# EAGLE board ZED_BREAKOUT v32 (EAGLE 9.7.0)
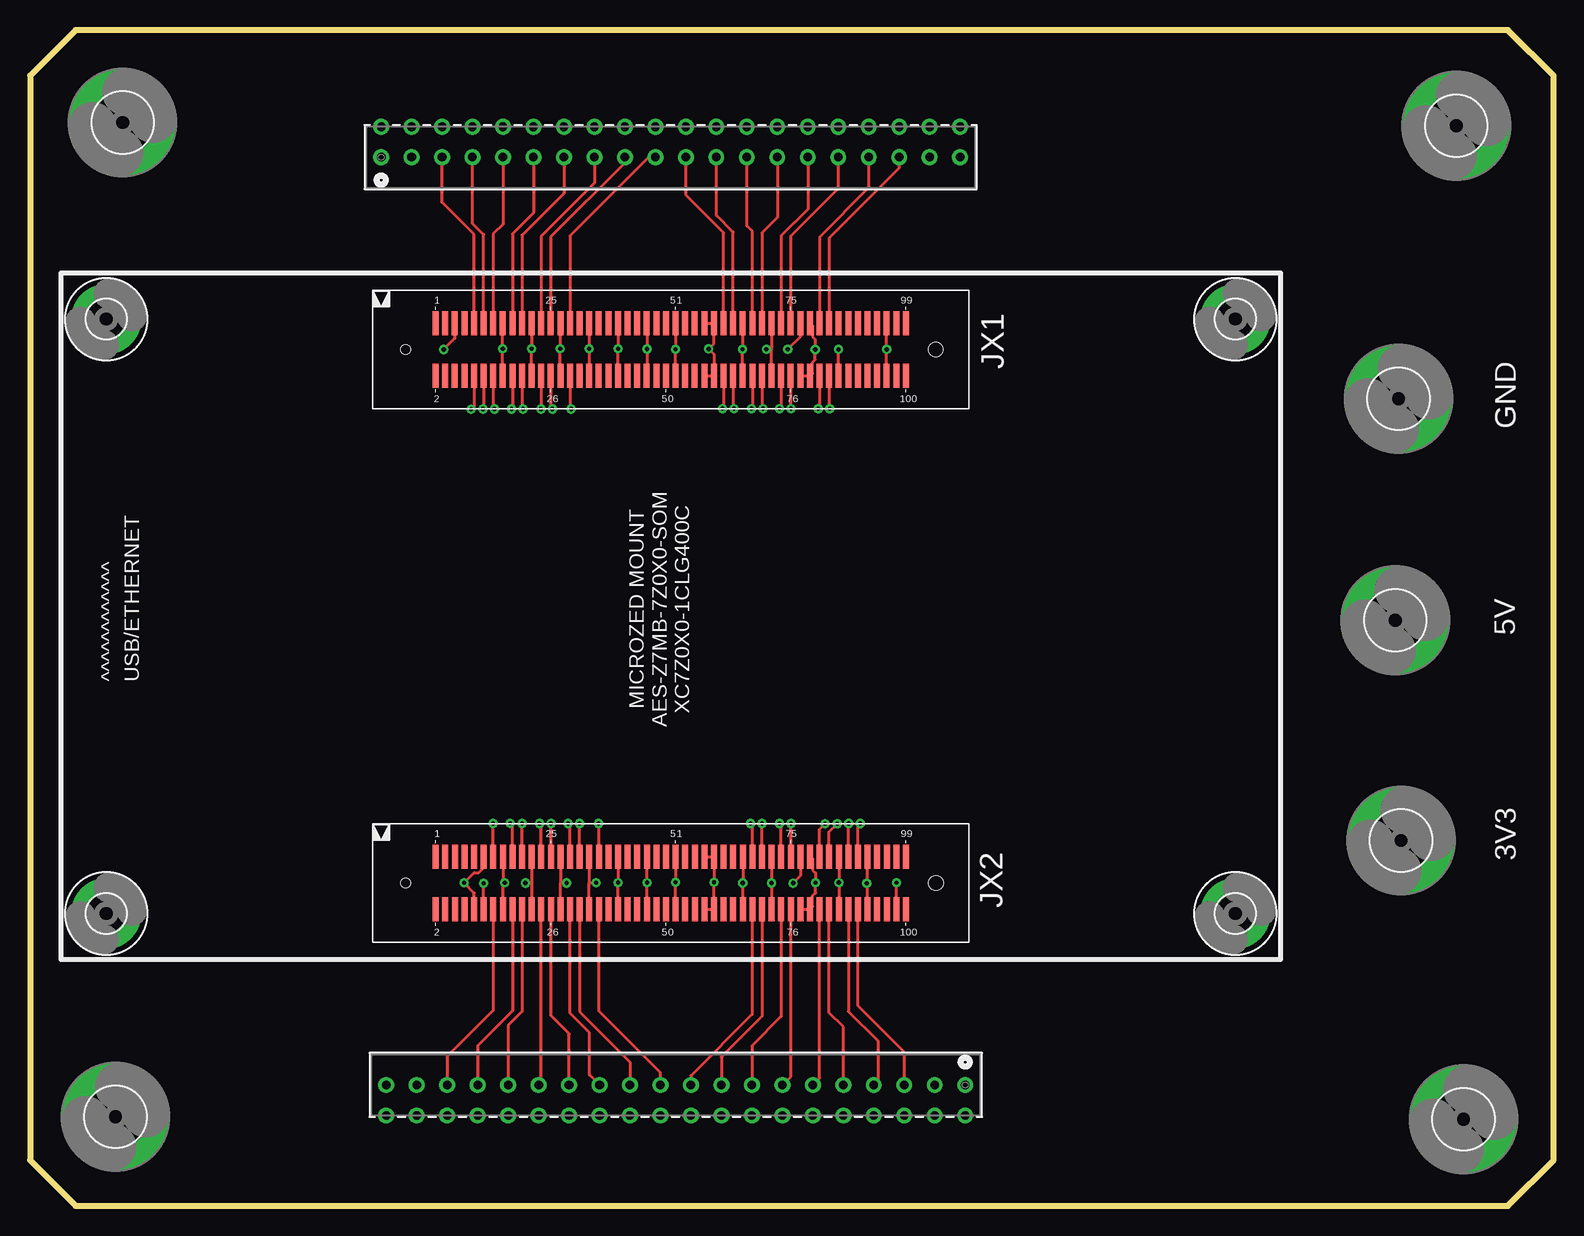
[diagram p0: board, top side]
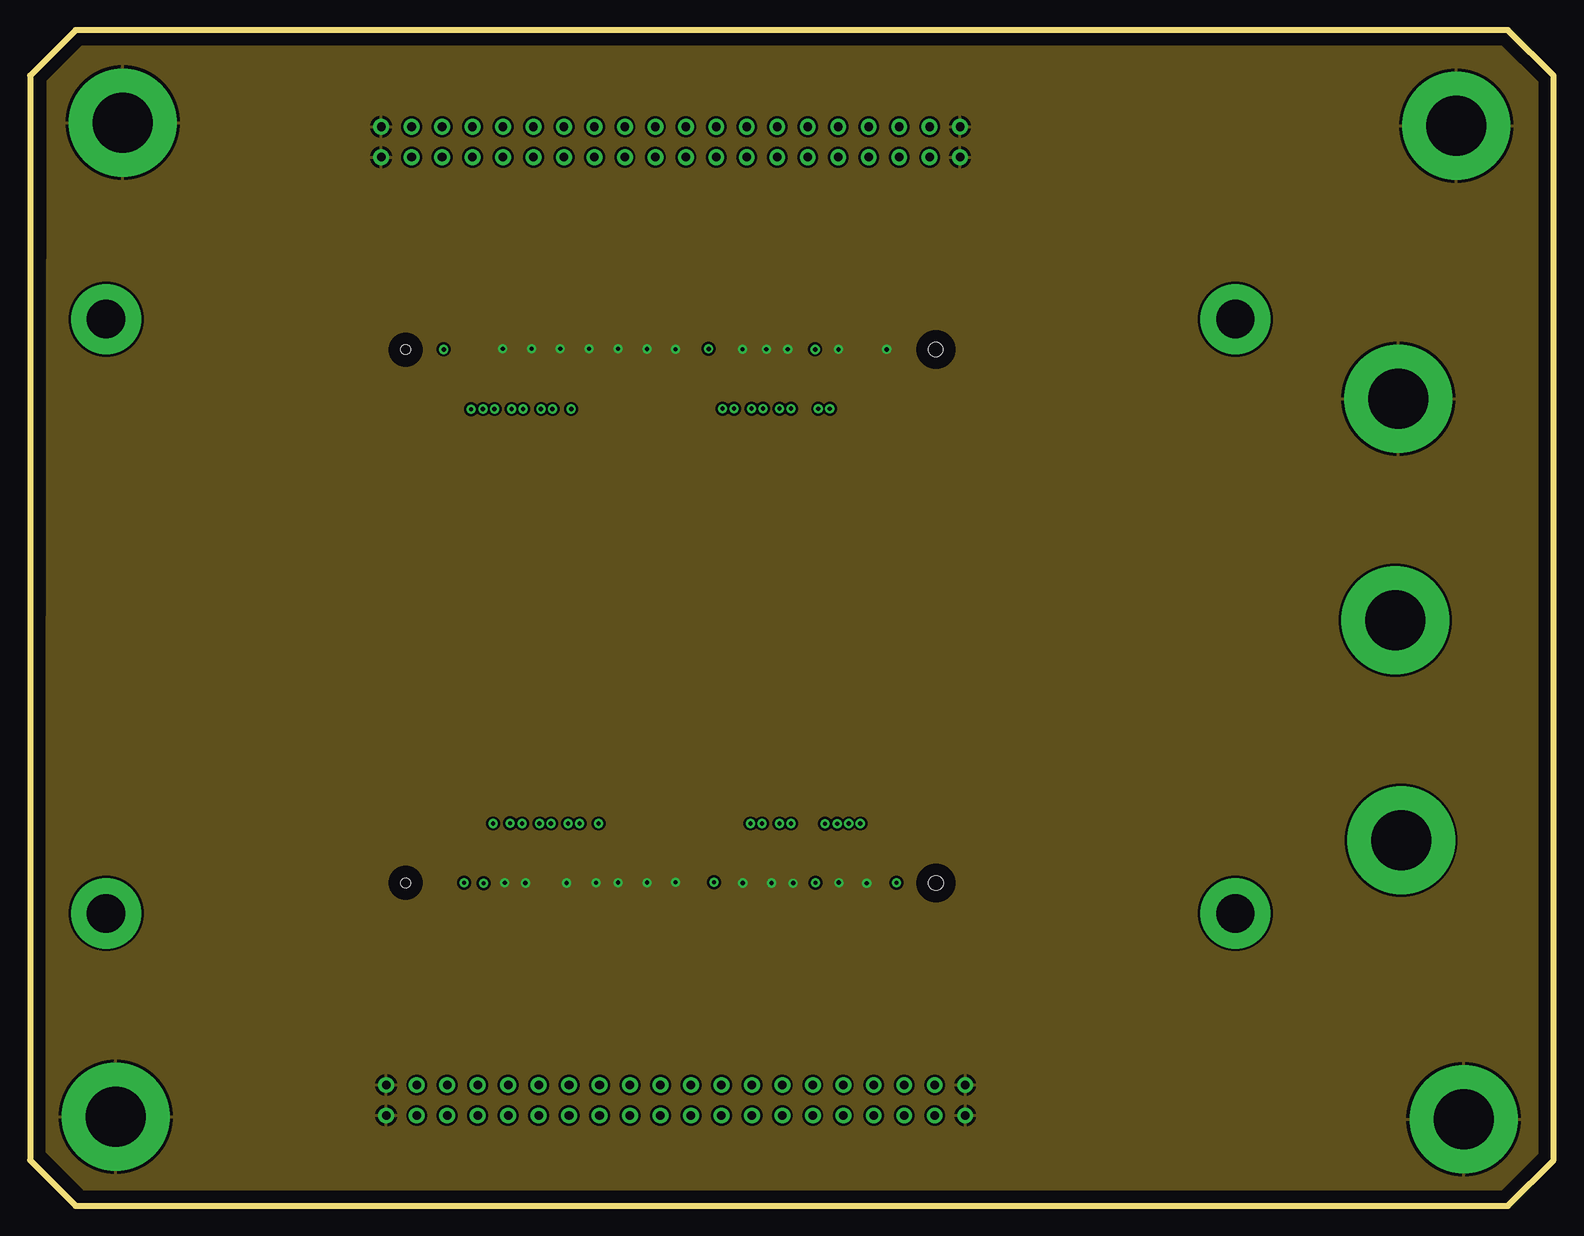
[diagram p1: board, inner layer Route2]
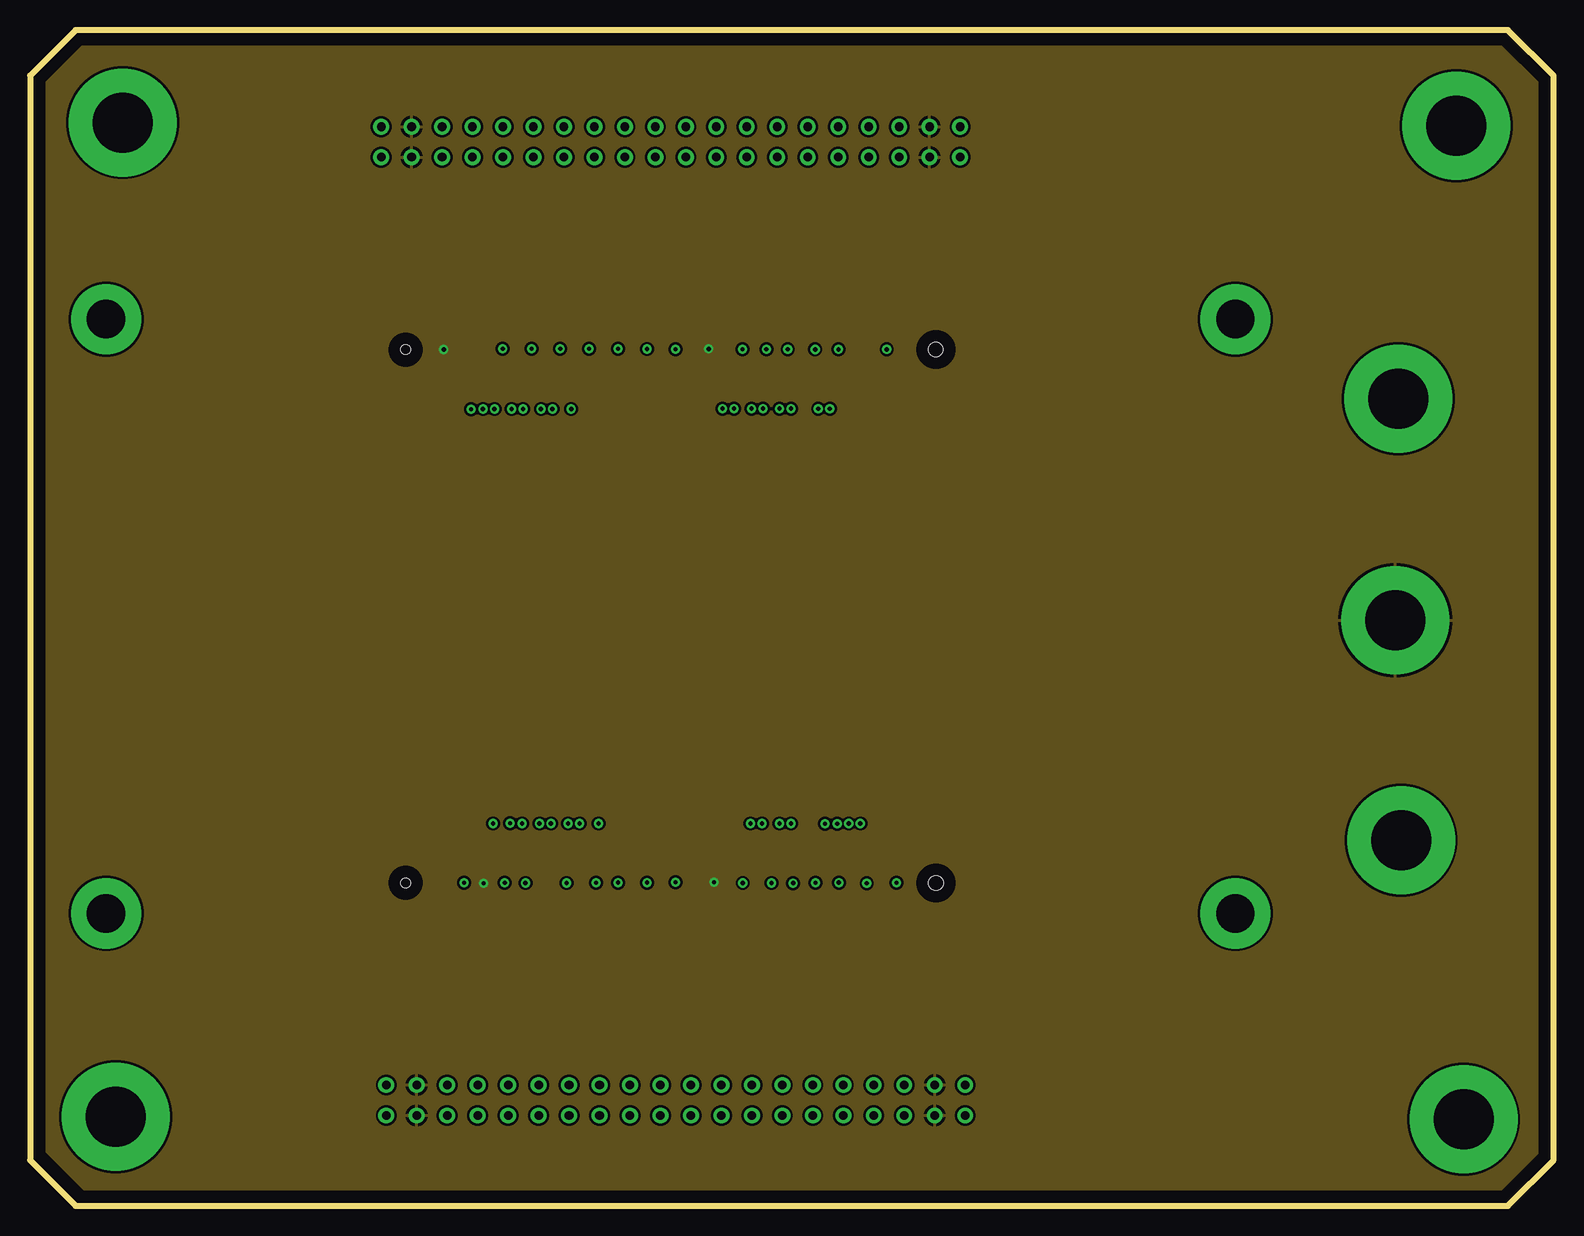
[diagram p2: board, inner layer Route3]
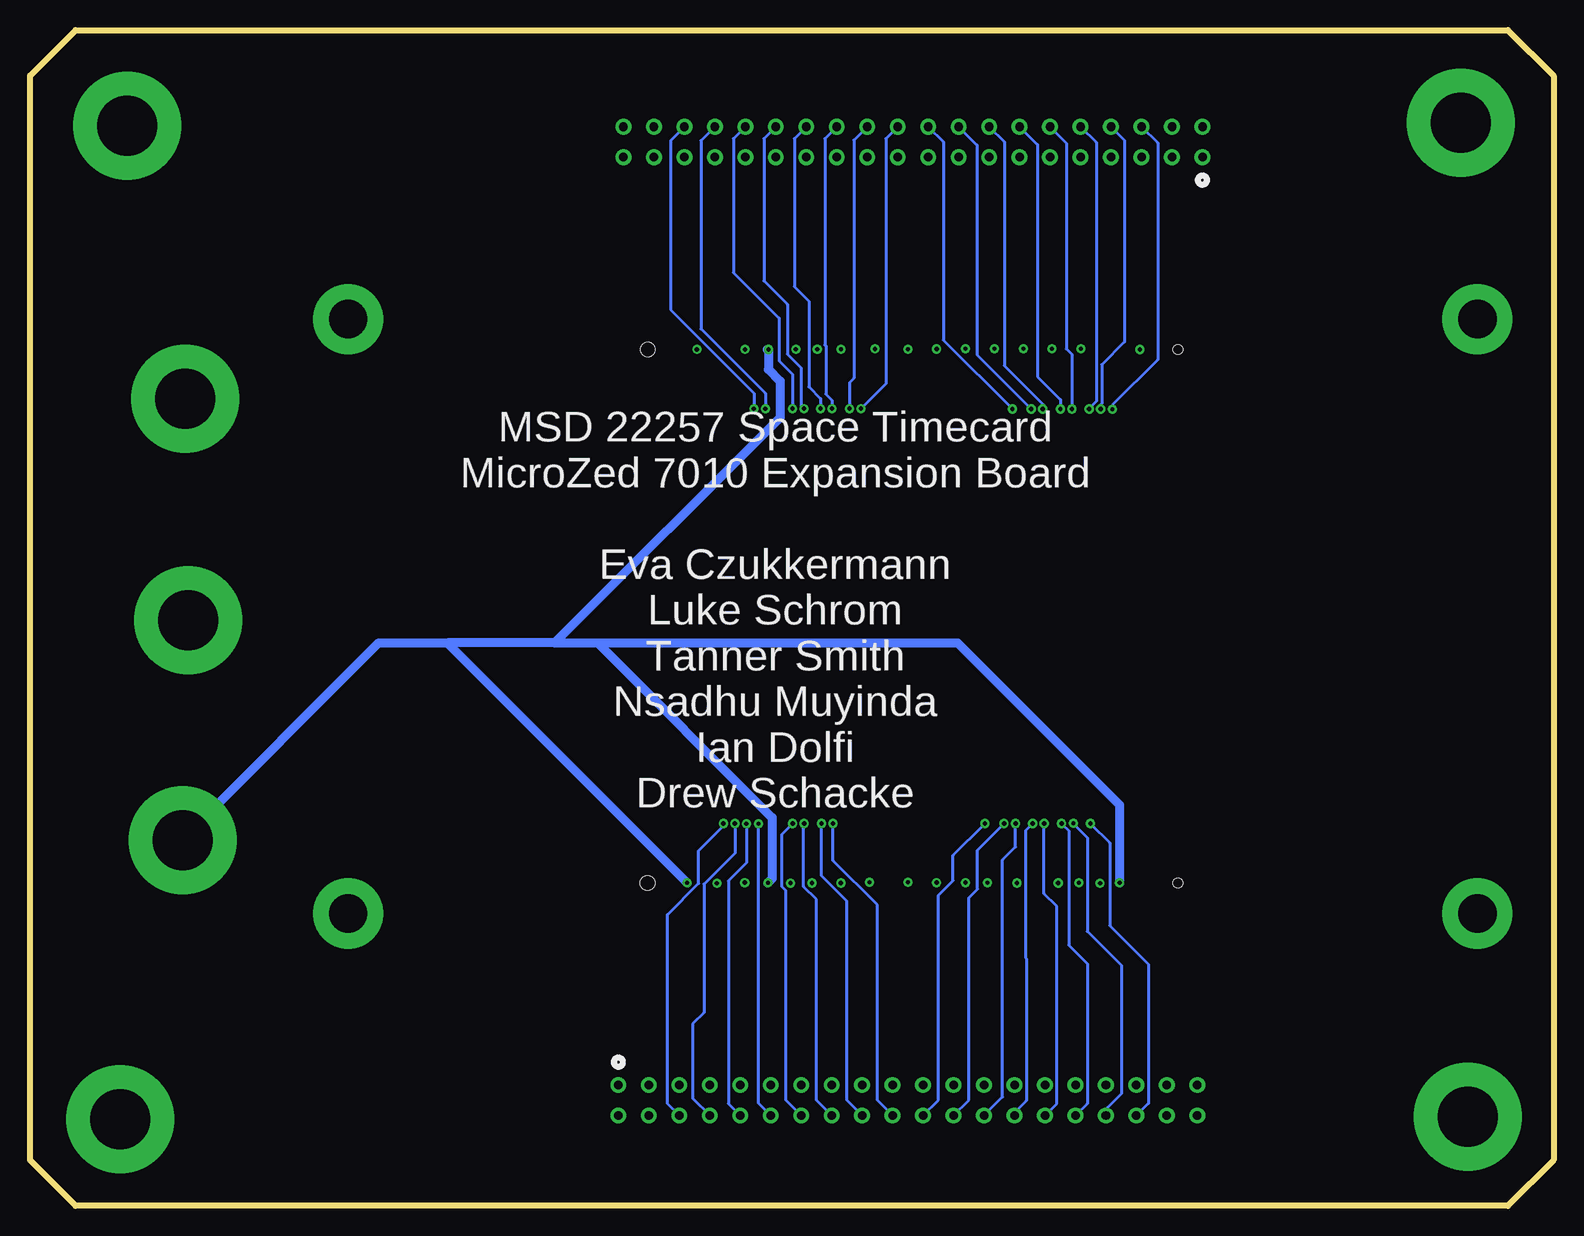
[diagram p3: board, bottom side, seen from below]

Size 127.01 x 97.99 mm. Coordinates in mm from the lower left corner, seen from the top.
Outline: 3.81,0 123.2,0 127.01,3.81 127.01,94.18 123.2,97.99 3.81,97.99 0,94.18 0,3.81 3.81,0
Copper layers (1*2*3*16): Top 0.035mm / dielectric 0.2mm / Route2 0.035mm / dielectric 0.2mm / Route3 0.035mm / dielectric 0.2mm / Bottom 0.035mm
Design rules "ciber_rules_revA *": minimum track width 7mil, minimum drill 0.35mm, track to track 8mil, track to pad 8mil, pad to pad 8mil, via to via 8mil, smd to smd 8mil, copper to edge 40mil, drill to drill 10mil, minimum pad ring 12mil, minimum via ring 8mil, stop-mask expansion 4mil, vias tented up to drill 15mil, thermal gap 10mil

## Footprints (pad centres in the part's own frame; a part is rotated, then mirrored left to right if it is on the bottom)
3,2-PAD = drill 3.2 pad 5.842: B3,2 0,0
5,0-PAD = drill 5 pad 9: B5 0,0
CON40_2X20_TU_HTS_SAI = drill 0.711 pad 1.27: 1 -24.13,-1.27; 2 -24.13,1.27; 3 -21.59,-1.27; 4 -21.59,1.27; 5 -19.05,-1.27; 6 -19.05,1.27; 7 -16.51,-1.27; 8 -16.51,1.27; 9 -13.97,-1.27; 10 -13.97,1.27; 11 -11.43,-1.27; 12 -11.43,1.27; 13 -8.89,-1.27; 14 -8.89,1.27; 15 -6.35,-1.27; 16 -6.35,1.27; 17 -3.81,-1.27; 18 -3.81,1.27; 19 -1.27,-1.27; 20 -1.27,1.27; 21 1.27,-1.27; 22 1.27,1.27; 23 3.81,-1.27; 24 3.81,1.27; 25 6.35,-1.27; 26 6.35,1.27; 27 8.89,-1.27; 28 8.89,1.27; 29 11.43,-1.27; 30 11.43,1.27; 31 13.97,-1.27; 32 13.97,1.27; 33 16.51,-1.27; 34 16.51,1.27; 35 19.05,-1.27; 36 19.05,1.27; 37 21.59,-1.27; 38 21.59,1.27; 39 24.13,-1.27; 40 24.13,1.27
61083-102402LF = smd 0.5 x 2: 1 2.5,2.2; 2 2.5,-2.2; 3 3.3,2.2; 4 3.3,-2.2; 5 4.1,2.2; 6 4.1,-2.2; 7 4.9,2.2; 8 4.9,-2.2; 9 5.7,2.2; 10 5.7,-2.2; 11 6.5,2.2; 12 6.5,-2.2; 13 7.3,2.2; 14 7.3,-2.2; 15 8.1,2.2; 16 8.1,-2.2; 17 8.9,2.2; 18 8.9,-2.2; 19 9.7,2.2; 20 9.7,-2.2; 21 10.5,2.2; 22 10.5,-2.2; 23 11.3,2.2; 24 11.3,-2.2; 25 12.1,2.2; 26 12.1,-2.2; 27 12.9,2.2; 28 12.9,-2.2; 29 13.7,2.2; 30 13.7,-2.2; 31 14.5,2.2; 32 14.5,-2.2; 33 15.3,2.2; 34 15.3,-2.2; 35 16.1,2.2; 36 16.1,-2.2; 37 16.9,2.2; 38 16.9,-2.2; 39 17.7,2.2; 40 17.7,-2.2; 41 18.5,2.2; 42 18.5,-2.2; 43 19.3,2.2; 44 19.3,-2.2; 45 20.1,2.2; 46 20.1,-2.2; 47 20.9,2.2; 48 20.9,-2.2; 49 21.7,2.2; 50 21.7,-2.2; 51 22.5,2.2; 52 22.5,-2.2; 53 23.3,2.2; 54 23.3,-2.2; 55 24.1,2.2; 56 24.1,-2.2; 57 24.9,2.2; 58 24.9,-2.2; 59 25.7,2.2; 60 25.7,-2.2; 61 26.5,2.2; 62 26.5,-2.2; 63 27.3,2.2; 64 27.3,-2.2; 65 28.1,2.2; 66 28.1,-2.2; 67 28.9,2.2; 68 28.9,-2.2; 69 29.7,2.2; 70 29.7,-2.2; 71 30.5,2.2; 72 30.5,-2.2; 73 31.3,2.2; 74 31.3,-2.2; 75 32.1,2.2; 76 32.1,-2.2; 77 32.9,2.2; 78 32.9,-2.2; 79 33.7,2.2; 80 33.7,-2.2; 81 34.5,2.2; 82 34.5,-2.2; 83 35.3,2.2; 84 35.3,-2.2; 85 36.1,2.2; 86 36.1,-2.2; 87 36.9,2.2; 88 36.9,-2.2; 89 37.7,2.2; 90 37.7,-2.2; 91 38.5,2.2; 92 38.5,-2.2; 93 39.3,2.2; 94 39.3,-2.2; 95 40.1,2.2; 96 40.1,-2.2; 97 40.9,2.2; 98 40.9,-2.2; 99 41.7,2.2; 100 41.7,-2.2 | hole 0.8: 0,0 | hole 1.2: 44.2,0

## Placement (x,y rotation side)
E$1  [3,2-PAD]  100.48,73.9 180 top
E$2  [3,2-PAD]  100.48,24.37 180 top
E$3  [3,2-PAD]  6.35,24.37 180 top
E$4  [3,2-PAD]  6.35,73.9 180 top
H1  MOUNT-PAD-ROUND5.0  [5,0-PAD]  114.08,67.27 0 top
H2  MOUNT-PAD-ROUND5.0  [5,0-PAD]  114.29,30.45 0 top
H3  MOUNT-PAD-ROUND5.0  [5,0-PAD]  113.8,48.8 0 top
H801  MOUNT-PAD-ROUND5.0  [5,0-PAD]  118.9,90.01 0 top
H802  MOUNT-PAD-ROUND5.0  [5,0-PAD]  7.72,90.28 0 top
H803  MOUNT-PAD-ROUND5.0  [5,0-PAD]  7.13,7.42 0 top
H804  MOUNT-PAD-ROUND5.0  [5,0-PAD]  119.5,7.21 0 top
J1  TD-120-G-AACON40_2X20_TU_HTS_SAI  [CON40_2X20_TU_HTS_SAI]  53.4,88.66 0 top
J2  TD-120-G-AACON40_2X20_TU_HTS_SAI  [CON40_2X20_TU_HTS_SAI]  53.83,8.8 180 top
JX1  61083-102402LF  [61083-102402LF]  31.31,71.36 0 top
JX2  61083-102402LF  [61083-102402LF]  31.32,26.91 0 top

## Library data of the parts
E$1-E$4 H1-H3 H801-H804 = holes
J1 J2 = 2024-11-13_22-37-46_Library; COPYRIGHT: Copyright (C) 2024 Ultra Librarian. All rights reserved.; MANUFACTURER_PART_NUMBER: TD-120-G-AA; MFR_NAME: Samtec Inc
JX1 JX2 = interface_board

## Nets
3V3: H2.B5 JX1.78 JX1.79 JX1.80 JX2.10 JX2.11 JX2.78 JX2.79 JX2.80 JX2.98
5V: H3.B5 J1.3 J1.4 J1.37 J1.38 J2.3 J2.4 J2.37 J2.38 JX1.5 JX1.57 JX1.58 JX1.59 JX1.60 JX2.12 JX2.57 JX2.58 JX2.59 JX2.60
34_N17: J1.33 JX1.81
34_N18: JX1.47
34_N20: JX1.48
34_P14: J1.16 JX1.24
34_P15: J1.34 JX1.82
34_P16: J1.36 JX1.84
34_P18: J1.35 JX1.83
34_P19: JX1.49
34_P20: JX1.50
34_R14: J1.18 JX1.26
34_R16: J1.25 JX1.67
34_R17: J1.27 JX1.69
34_R18: J1.28 JX1.70
34_R19: J1.5 JX1.9
34_T10: J1.9 JX1.13
34_T11: J1.7 JX1.11
34_T12: J1.8 JX1.12
34_T14: J1.15 JX1.23
34_T15: J1.17 JX1.25
34_T16: JX1.35
34_T17: J1.26 JX1.68
34_T19: J1.6 JX1.10
34_T20: JX1.53
34_U12: J1.10 JX1.14
34_U13: J1.11 JX1.17
34_U14: JX1.41
34_U15: JX1.43
34_U17: JX1.37
34_U18: JX1.42
34_U19: JX1.44
34_U20: JX1.55
34_V12: J1.12 JX1.18
34_V13: J1.13 JX1.19
34_V15: JX1.36
34_V16: J1.22 JX1.62
34_V17: J1.29 JX1.73
34_V18: J1.31 JX1.75
34_V20: JX1.54
34_W13: J1.14 JX1.20
34_W14: J1.20 JX1.30
34_W15: JX1.38
34_W16: J1.24 JX1.64
34_W18: J1.30 JX1.74
34_W19: J1.32 JX1.76
34_W20: JX1.56
34_Y14: JX1.32
34_Y16: J1.19 JX1.29
34_Y17: JX1.31
34_Y18: J1.21 JX1.61
34_Y19: J1.23 JX1.63
35_A20: J2.31 JX2.20
35_B19: J2.33 JX2.18
35_B20: J2.32 JX2.19
35_C20: J2.34 JX2.17
35_D18: J2.28 JX2.25
35_D19: J2.29 JX2.24
35_D20: J2.27 JX2.26
35_E17: J2.30 JX2.23
35_E18: J2.26 JX2.29
35_E19: J2.24 JX2.31
35_F16: J2.25 JX2.30
35_F17: J2.23 JX2.32
35_F19: JX2.62
35_F20: JX2.64
35_G14: J2.36 JX2.13
35_G15: J2.13 JX2.76
35_G17: JX2.61
35_G18: JX2.63
35_G19: J2.20 JX2.67
35_G20: J2.18 JX2.69
35_H15: J2.15 JX2.74
35_H16: JX2.53
35_H17: JX2.55
35_H18: JX2.56
35_H20: J2.17 JX2.70
35_J14: J2.14 JX2.75
35_J15: J2.35 JX2.14
35_J16: J2.5 JX2.90
35_J18: JX2.54
35_J19: JX2.44
35_J20: J2.19 JX2.68
35_K14: J2.16 JX2.73
35_K16: J2.7 JX2.88
35_K17: JX2.48
35_K18: JX2.50
35_K19: JX2.42
35_L14: J2.11 JX2.82
35_L15: J2.9 JX2.84
35_L16: JX2.47
35_L17: JX2.49
35_L19: J2.22 JX2.35
35_L20: JX2.37
35_M14: J2.8 JX2.87
35_M15: J2.6 JX2.89
35_M17: JX2.41
35_M18: JX2.43
35_M19: J2.21 JX2.36
35_M20: JX2.38
35_N15: J2.12 JX2.81
35_N16: J2.10 JX2.83
GND: H1.B5 H801.B5 H802.B5 H803.B5 H804.B5 J1.1 J1.2 J1.39 J1.40 J2.1 J2.2 J2.39 J2.40 JX1.15 JX1.16 JX1.21 JX1.22 JX1.27 JX1.28 JX1.33 JX1.34 JX1.39 JX1.40 JX1.45 JX1.46 JX1.51 JX1.52 JX1.65 JX1.66 JX1.71 JX1.72 JX1.77 JX1.86 JX1.95 JX1.96 JX2.15 JX2.16 JX2.21 JX2.22 JX2.27 JX2.28 JX2.33 JX2.34 JX2.39 JX2.40 JX2.45 JX2.46 JX2.51 JX2.52 JX2.65 JX2.66 JX2.71 JX2.72 JX2.77 JX2.85 JX2.86 JX2.91 JX2.92

## Tracks (layer width: path | path; a pad name or v marks a point on that pad's centre or on a via)
3V3  (via drill 0.35)
  Top 0.254: v72.23,26.92 v72.22,26.92 JX2.98 | JX2.10 37.02,26.07 v36.18,26.92 37.04,27.78 37.41,27.78 37.82,28.19 JX2.11 | JX2.78 JX2.80 65.24,24.93 65.24,25.85 65.49,26.09 v65.49,26.92 65.49,27.73 65.24,27.97 65.24,28.89 JX2.79 | JX1.78 JX1.80 65.23,69.38 65.23,70.3 65.46,70.52 v65.46,71.37 65.46,72.2 65.23,72.42 65.23,73.34 JX1.79
  Bottom 0.762: H2.B5 114.29,30.56 97.94,46.91 92.2,46.91 | 65.56,71.37 v65.46,71.37 65.46,69.72 64.48,68.74 64.48,65.69 83.26,46.91 | 83.26,46.91 79.7,46.91 | 79.7,46.91 49.68,46.91 36.18,33.41 v36.18,26.92 | v72.23,26.92 92.2,46.89 92.2,46.91 | 83.26,46.91 92.2,46.91 | 83.27,46.9 83.26,46.91 | v65.49,26.92 65.14,27.26 65.14,32.36 79.7,46.91
5V  (via drill 0.35)
  Top 0.254: JX2.58 JX2.60 v57.02,26.96 JX2.59 JX2.57 | JX1.58 JX1.60 57.01,70.98 v56.58,71.41 57.01,71.85 JX1.59 JX1.57 | JX2.12 37.8,24.73 v37.8,26.89 | JX1.5 35.41,72.29 v34.49,71.37
  pour Route3: 4.56,1.35 122.58,1.32 125.78,4.52 125.78,93.68 122.7,96.76 4.34,96.76 1.37,93.8 1.37,4.54
34_N17
  Top 0.254: J1.33 69.91,84.84 65.81,80.74 JX1.81
34_P14  (via drill 0.35)
  Top 0.254: JX1.24 42.61,66.43 v42.59,66.41
  Bottom 0.254: J1.16 45.78,88.66 45.78,70.02 42.59,66.82 v42.59,66.41
34_P15  (via drill 0.35)
  Top 0.254: JX1.82 65.81,66.53 v65.71,66.42
  Bottom 0.254: J1.34 71.07,88.77 71.07,73.08 65.71,67.72 v65.71,66.42
34_P16  (via drill 0.35)
  Top 0.254: JX1.84 66.61,66.48 v66.67,66.42
  Bottom 0.254: J1.36 73.61,88.77 73.61,74.68 66.67,67.74 v66.67,66.42
34_P18
  Top 0.254: J1.35 72.45,86.48 66.61,80.64 JX1.83
34_R14  (via drill 0.35)
  Top 0.254: JX1.26 43.41,66.54 v43.55,66.41
  Bottom 0.254: J1.18 48.06,88.4 48.06,70.92 v43.55,66.41
34_R16
  Top 0.254: J1.25 59.75,81.67 60.21,81.21 JX1.67
34_R17
  Top 0.254: J1.27 62.29,82.37 61.01,81.09 JX1.69
34_R18  (via drill 0.35)
  Top 0.254: JX1.70 61.01,66.53 v61.1,66.44
  Bottom 0.254: J1.28 63.28,88.94 63.28,76.6 62.09,75.41 62.09,68.25 61.1,67.26 v61.1,66.44
34_R19
  Top 0.254: J1.5 34.35,83.62 37.01,80.96 JX1.9
34_T10
  Top 0.254: J1.9 39.43,81.82 38.61,81 JX1.13
34_T11
  Top 0.254: J1.7 36.89,81.85 37.81,80.93 JX1.11
34_T12  (via drill 0.35)
  Top 0.254: JX1.12 37.81,66.47 v37.76,66.41
  Bottom 0.254: v37.76,66.41 37.76,66.76 37.66,66.86 37.66,70.1 35.76,72 35.76,88.01 35.76,88.32 35.76,88.8 J1.8
34_T14
  Top 0.254: J1.15 47.05,85.25 42.61,80.81 JX1.23
34_T15
  Top 0.254: J1.17 49.59,86.93 43.41,80.75 JX1.25
34_T17  (via drill 0.35)
  Top 0.254: JX1.68 60.21,66.51 v60.14,66.44
  Bottom 0.254: J1.26 60.74,88.94 60.74,71.75 60.67,71.68 60.67,67.65 60.14,67.12 v60.14,66.44
34_T19  (via drill 0.35)
  Top 0.254: JX1.10 37.01,66.63 v36.78,66.39
  Bottom 0.254: J1.6 33,88.58 33,70.52 36.78,66.74 v36.78,66.39
34_U12  (via drill 0.35)
  Top 0.254: JX1.14 38.61,66.51 v38.72,66.41
  Bottom 0.254: J1.10 38.12,88.62 38.12,67.04 38.64,66.53 38.64,66.49 v38.72,66.41
34_U13
  Top 0.254: J1.11 41.97,82.76 40.21,81 JX1.17
34_V12  (via drill 0.35)
  Top 0.254: JX1.18 40.21,66.47 v40.15,66.41
  Bottom 0.254: J1.12 40.62,88.57 40.62,71.42 40.15,70.95 v40.15,66.41
34_V13
  Top 0.254: J1.13 44.51,84.4 41.01,80.9 JX1.19
34_V16  (via drill 0.35)
  Top 0.254: JX1.62 57.81,66.52 v57.73,66.44
  Bottom 0.254: J1.22 55.66,88.94 55.66,68.51 v57.73,66.44
34_V17
  Top 0.254: J1.29 64.83,83.06 62.61,80.84 JX1.73
34_V18
  Top 0.254: J1.31 67.37,84.77 63.41,80.81 JX1.75
34_W13  (via drill 0.35)
  Top 0.254: JX1.20 41.01,66.5 v41.11,66.41
  Bottom 0.254: J1.14 43.01,88.43 43.01,69.1 41.11,67.19 v41.11,66.41
34_W14  (via drill 0.35)
  Top 0.254: JX1.30 45.01,66.51 v45.12,66.41
  Bottom 0.254: J1.20 50.86,88.66 50.86,72.16 v45.12,66.41
34_W16  (via drill 0.35)
  Top 0.254: JX1.64 58.61,66.52 v58.69,66.44
  Bottom 0.254: J1.24 58.32,88.82 58.32,68.98 58.69,68.61 v58.69,66.44
34_W18  (via drill 0.35)
  Top 0.254: JX1.74 62.61,66.57 v62.49,66.44
  Bottom 0.254: v62.49,66.44 62.72,66.68 62.72,69.83 63.87,70.98 63.87,75.13 65.82,77.08 65.82,88.94 J1.30
34_W19  (via drill 0.35)
  Top 0.254: JX1.76 63.41,66.48 v63.45,66.44
  Bottom 0.254: 63.45,66.4 v63.45,66.44 63.45,69.31 64.57,70.42 64.57,73.98 68.36,77.78 68.36,88.94 J1.32
34_Y16
  Top 0.254: J1.19 51.56,87.39 45.01,80.84 JX1.29
34_Y18
  Top 0.254: J1.21 54.67,84.22 57.81,81.08 JX1.61
34_Y19
  Top 0.254: J1.23 57.21,82.54 58.61,81.14 JX1.63
35_A20
  Top 0.254: J2.31 39.86,15.05 41.02,16.21 JX2.20
35_B19
  Top 0.254: J2.33 37.32,13.36 40.22,16.27 JX2.18
35_B20  (via drill 0.35)
  Top 0.254: JX2.19 41.02,31.85 v41.01,31.86
  Bottom 0.254: v41.01,31.86 40.42,31.27 40.42,21.73 38.87,20.18 38.87,8.52 J2.32
35_C20  (via drill 0.35)
  Top 0.254: JX2.17 40.22,31.69 v40.03,31.89
  Bottom 0.254: J2.34 37.32,8.06 36.02,9.36 36.02,20.04 38.87,22.88 38.87,30.68 40.03,31.84 v40.03,31.89
35_D18  (via drill 0.35)
  Top 0.254: JX2.25 v43.42,31.86
  Bottom 0.254: v43.42,31.86 44.02,31.27 44.02,20.69 43.95,20.61 43.95,8.76 44.94,7.77 J2.28
35_D19
  Top 0.254: J2.29 42.62,10.3 JX2.24
35_D20
  Top 0.254: J2.27 44.94,14.34 43.42,15.85 JX2.26
35_E17  (via drill 0.35)
  Top 0.254: JX2.23 42.62,31.71 v42.46,31.86
  Bottom 0.254: 42.66,31.67 v42.46,31.86 42.46,26.02 41.41,24.96 41.41,8.52 J2.30
35_E18  (via drill 0.35)
  Top 0.254: JX2.29 45.02,31.68 v44.84,31.86
  Bottom 0.254: v44.84,31.86 44.84,29.92 45.93,28.83 45.93,9.08 J2.26
35_E19  (via drill 0.35)
  Top 0.254: JX2.31 45.82,31.84 v45.8,31.86
  Bottom 0.254: J2.24 48.75,8.8 48.75,25.66 48.02,26.39 48.02,29.65 v45.8,31.86
35_F16
  Top 0.254: J2.25 46.64,10.91 46.64,14.42 45.02,16.03 JX2.30
35_F17
  Top 0.254: J2.23 50.02,11.99 45.82,16.18 JX2.32
35_G14  (via drill 0.35)
  Top 0.254: JX2.13 38.62,31.85 v38.61,31.86
  Bottom 0.254: v38.61,31.86 37,30.26 37,23.36 33.77,20.13 33.77,8.54 J2.36
35_G15
  Top 0.254: J2.13 63.42,10.78 JX2.76
35_G19  (via drill 0.35)
  Top 0.254: JX2.67 60.22,31.7 v60.06,31.86
  Bottom 0.254: J2.20 56.37,8.8 56.37,25.08 60.06,28.77 v60.06,31.86
35_G20  (via drill 0.35)
  Top 0.254: JX2.69 v61.02,31.86
  Bottom 0.254: J2.18 58.91,8.8 58.91,25.4 61.02,27.51 v61.02,31.86
35_H15
  Top 0.254: J2.15 60.18,13.34 62.62,15.79 JX2.74
35_H20
  Top 0.254: J2.17 57.64,12.43 61.02,15.81 JX2.70
35_J14  (via drill 0.35)
  Top 0.254: JX2.75 v63.42,31.86 v63.43,31.86
  Bottom 0.254: J2.14 63.99,8.8 63.99,26.27 64.33,26.61 64.33,30.97 v63.43,31.86
35_J15
  Top 0.254: J2.35 34.78,12.46 38.62,16.3 JX2.14
35_J16
  Top 0.254: J2.5 72.88,12.81 69.02,16.67 JX2.90
35_J20
  Top 0.254: J2.19 55.1,10.85 60.2,15.95 60.2,24.68 JX2.68
35_K14  (via drill 0.35)
  Top 0.254: JX2.73 62.62,31.71 v62.47,31.86
  Bottom 0.254: J2.16 61.45,8.8 61.45,25.54 62.52,26.62 62.52,31.82 v62.47,31.86
35_K16
  Top 0.254: J2.7 70.67,10.41 70.67,13.74 68.22,16.19 JX2.88
35_L14
  Top 0.254: J2.11 65.82,10.64 JX2.82
35_L15
  Top 0.254: J2.9 67.8,14.92 66.62,16.09 JX2.84
35_L19  (via drill 0.35)
  Top 0.254: JX2.35 47.42,31.85 v47.41,31.86
  Bottom 0.254: J2.22 51.29,8.8 51.29,25.88 50.07,27.11 50.07,29.2 v47.41,31.86
35_M14  (via drill 0.35)
  Top 0.254: JX2.87 68.22,31.84 v68.25,31.86
  Bottom 0.254: v68.25,31.86 68.25,29.38 70.82,26.81 70.82,16.11 71.76,15.17 71.76,8.96 J2.8
35_M15  (via drill 0.35)
  Top 0.254: JX2.89 69.02,31.68 v69.21,31.86
  Bottom 0.254: J2.6 73.87,8.52 73.87,24.28 71.28,26.87 71.28,29.61 69.21,31.68 v69.21,31.86
35_M19
  Top 0.254: J2.21 52.56,11.1 47.42,16.23 JX2.36
35_N15  (via drill 0.35)
  Top 0.254: JX2.81 65.82,31.39 v66.27,31.83
  Bottom 0.254: J2.12 66.27,8.55 v66.27,31.83
35_N16  (via drill 0.35)
  Top 0.254: JX2.83 66.62,31.18 v67.29,31.85
  Bottom 0.254: v67.29,31.85 67.29,28.59 68.79,27.09 68.79,8.52 J2.10
GND  (via drill 0.35)
  Top 0.254: JX1.16 v39.41,71.42 JX1.15 | JX1.22 v41.81,71.42 | v41.81,71.42 v41.82,71.42 | JX1.21 v41.81,71.42 | JX1.28 v44.2,71.42 v44.21,71.42 JX1.27 | JX1.34 46.6,69.16 v46.6,71.42 46.61,71.42 JX1.33 | JX1.40 49.01,71.44 | 49.01,71.44 v49.03,71.44 | JX1.39 49.01,71.44 | JX1.46 51.43,69.16 v51.43,71.41 51.43,73.56 JX1.45 | JX1.52 v53.81,71.39 | v53.81,71.39 | JX1.51 v53.81,71.39 | JX1.66 v59.41,71.39 | v59.41,71.39 v59.4,71.39 | JX1.65 v59.41,71.39 | JX1.72 61.81,71.39 | JX1.71 61.81,71.39 | JX1.86 v67.4,71.37 | JX1.95 v71.41,71.37 JX1.96 | JX2.16 39.42,26.93 | JX2.15 39.42,26.93 | JX2.21 41.82,26.91 41.81,26.91 | JX2.28 44.22,26.91 | JX2.27 44.22,26.91 | JX2.34 46.62,26.93 | JX2.33 46.62,26.93 | JX2.40 v49.02,26.94 | v49.02,26.94 v49.03,26.94 | JX2.39 v49.02,26.94 | JX2.46 v51.43,26.94 v51.42,26.94 JX2.45 | JX2.52 53.82,26.96 | 53.82,26.96 v53.81,26.96 | JX2.51 53.82,26.96 | JX2.66 v59.42,26.91 | v59.42,26.91 | JX2.65 v59.42,26.91 | JX2.72 61.82,26.91 v61.81,26.91 61.81,29.11 JX2.71 | JX2.86 v67.42,26.94 JX2.85 | JX2.91 69.82,26.94 | JX2.77 64.22,27.51 v63.62,26.9 | 61.81,71.39 v61.38,71.39 | JX1.77 64.21,72.43 v63.16,71.38 | 39.42,26.93 v39.58,26.93 | 69.82,26.94 v69.75,26.88 | JX2.92 69.82,26.94 | v41.3,26.91 41.81,26.91 | 41.81,26.91 41.81,24.72 JX2.22 | 44.22,26.91 v44.73,26.91 | 46.62,26.93 v47.2,26.93
  pour Route2: 4.51,1.34 122.63,1.34 125.85,4.55 125.85,93.69 125.82,93.71 122.69,96.83 4.15,96.83 1.45,93.76 1.29,4.55

## Text on the board
tPlace: GND | MICROZED MOUNT / AES-Z7MB-7Z0X0-SOM / XC7Z0X0-1CLG400C | 5V | ^^^^^^^^^^^^ / USB/ETHERNET | 3V3
bPlace: MSD 22257 Space Timecard / MicroZed 7010 Expansion Board / / Eva Czukkermann / Luke Schrom / Tanner Smith / Nsadhu Muyinda / Ian Dolfi / Drew Schacke